# Altium PCB PCB.PcbDoc
Units mil, origin at the board's own origin, x right, y up, seen from the top; angles counter-clockwise.
Board outline 850 x 875 mil, 2 copper layers (Top Layer, Bottom Layer); 11 components, 16 nets, 48 pads, 8 vias.
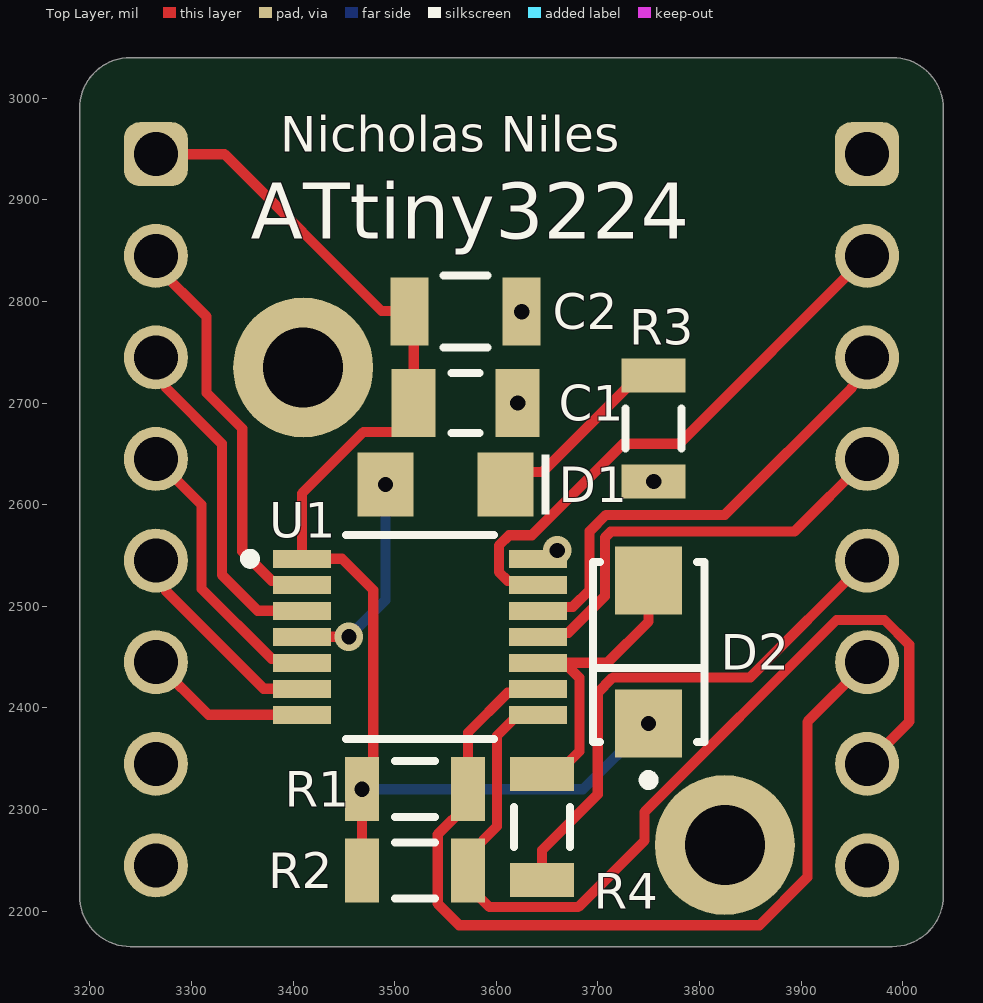
[diagram p0: Top Layer view]
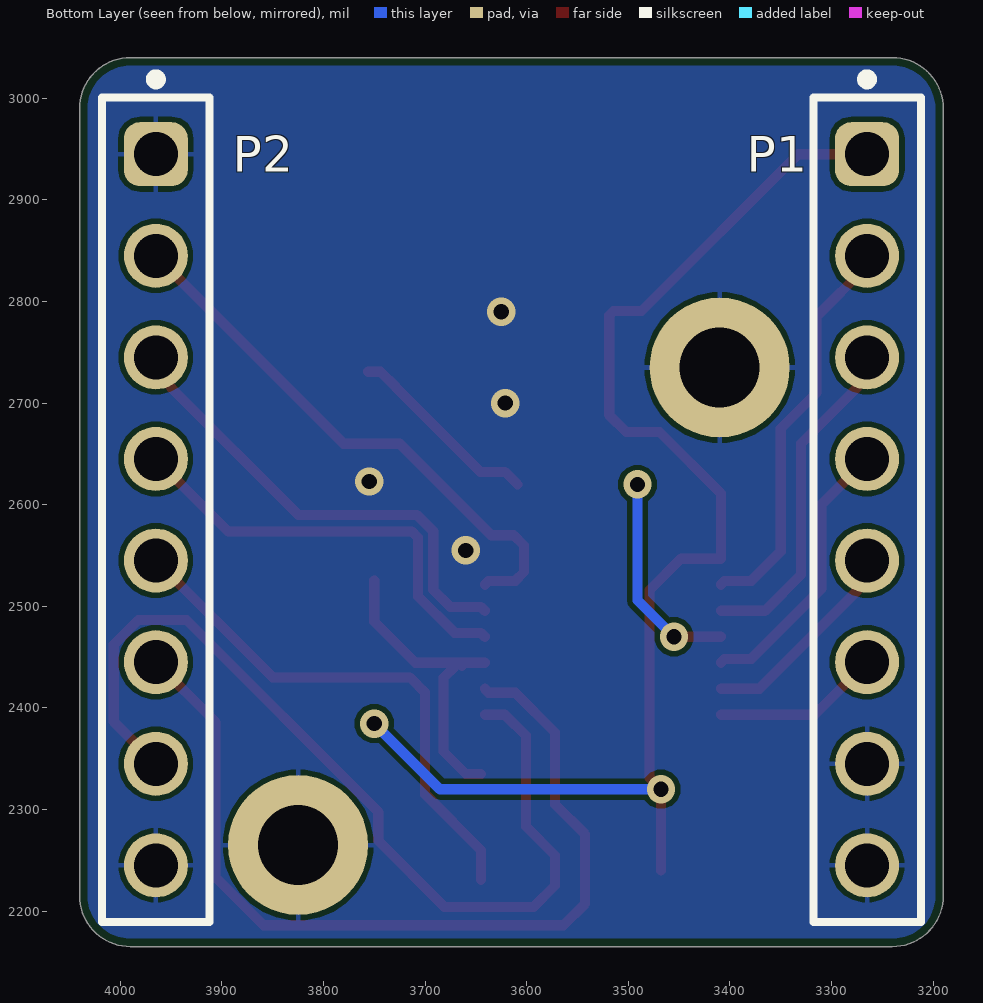
[diagram p1: Bottom Layer view, seen from below]
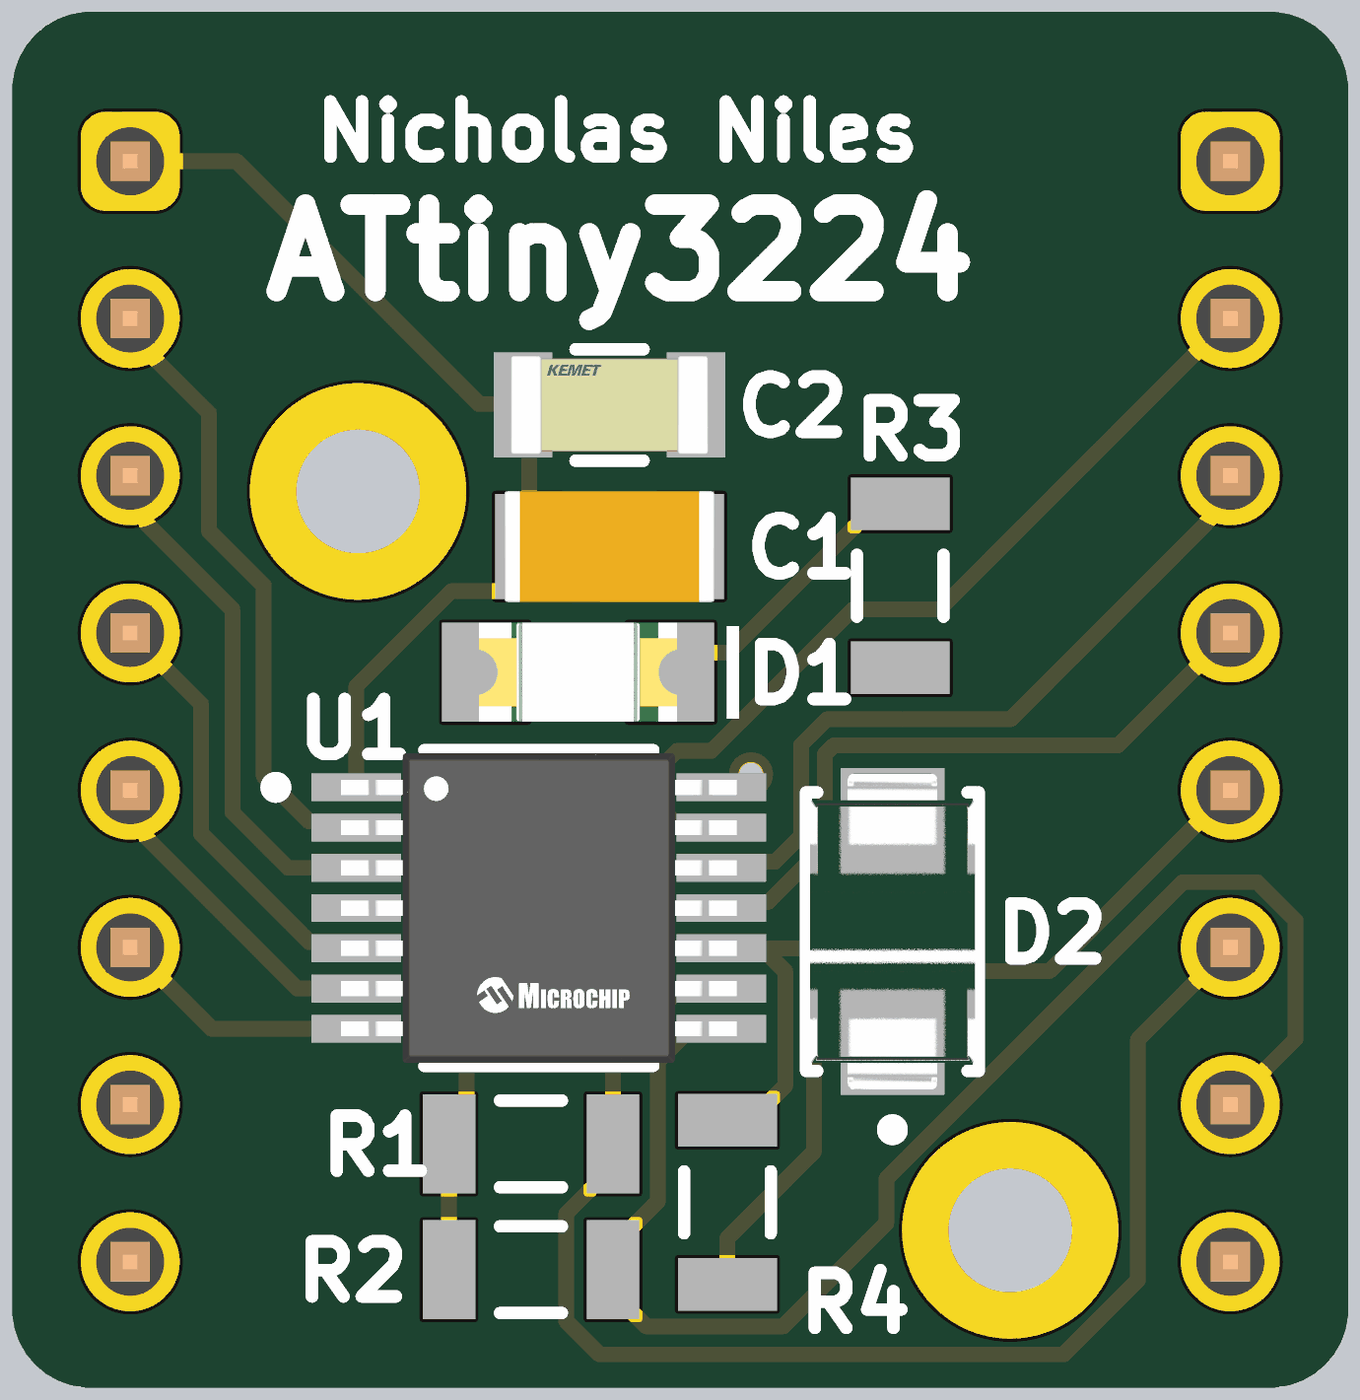
[diagram p2: 3D render of the assembled board from above, using the file's embedded part models]

## Layer stack, top to bottom
Top Solder: solder mask 0.4, Solder Resist, Dk 3.5
Top Layer: signal copper 1.4
Dielectric 1: dielectric 12.6, FR-4, Dk 4.8
Bottom Layer: signal copper 1.4
Bottom Solder: solder mask 0.4, Solder Resist, Dk 3.5

## Board outline
3190,2215 3190,2990 cw(c3240,2990) 3240,3040 3990,3040 cw(c3990,2990) 4040,2990 4040,2215 cw(c3990,2215) 3990,2165 3240,2165 cw(c3240,2215)

## Design rules (kind name [scope] priority, off if disabled: settings)
BoardOutlineClearance [All] p1: gap=7.87 ignorepadtopadclearanceinfootprint=FALSE
Clearance [All] p1: gap=5 ignorepadtopadclearanceinfootprint=TRUE except(10: Arc-Hole Track-Hole SMDPad-Hole THPad-Hole Via-Hole Fill-Hole Poly-Hole Region-Hole Text-Hole)
ComponentClearance [All] p1: gap=5 collisioncheckmode=3 verticalgap=5 showdistances=TRUE
DiffPairsRouting [All] p1: maxlimit=10 minlimit=5 mostfreqgap=5 toplayer_minwidth=5 toplayer_maxwidth=1000 toplayer_prefwidth=5 bottomlayer_minwidth=5 bottomlayer_maxwidth=1000 bottomlayer_prefwidth=5 maxuncoupledlength=500
Height [All] p1: minheight=0 maxheight=71497.94 prefheight=500
HoleSize [All] p1: absolutevalues=TRUE maxlimit=248.03 minlimit=11.81 maxpercent=80.000 minpercent=20.000
HoleToHoleClearance [All] p1: gap=10 allowstackedmicrovias=FALSE
MinimumAnnularRing [All] p1: minimumring=6
MinimumSolderMaskSliver [All] p1: minsoldermaskwidth=6
PlaneClearance [All] p1: clearance=5
PlaneConnect PlaneConnectPowerPads [InPadClass('PowerPads')] p1: planeconnectstyle=Direct reliefexpansion=20 reliefentries=4 reliefconductorwidth=10 reliefairgap=10
PlaneConnect [All] p2: pad.planeconnectstyle=Relief pad.reliefexpansion=11.81 pad.reliefentries=4 pad.reliefconductorwidth=5 pad.reliefairgap=5 via.planeconnectstyle=Direct via.reliefexpansion=11.81 via.reliefentries=4 via.reliefconductorwidth=5 via.reliefairgap=5
PolygonConnect PolygonConnectPowerPads [All vs (InPadClass('PowerPads'))] p1: connectstyle=Direct reliefconductorwidth=10 reliefentries=4 polygonreliefangle="90 Angle" airgapwidth=10
PolygonConnect [All] p2: thpad.connectstyle=Relief thpad.reliefconductorwidth=5 thpad.reliefentries=4 thpad.polygonreliefangle="90 Angle" thpad.airgapwidth=5 smdpad.connectstyle=Relief smdpad.reliefconductorwidth=5 smdpad.reliefentries=4 smdpad.polygonreliefangle="90 Angle" smdpad.airgapwidth=5 via.connectstyle=Direct via.reliefconductorwidth=5 via.reliefentries=4 via.polygonreliefangle="90 Angle" via.airgapwidth=5
RoutingVias [All] p1: holewidth=11.81 width=23.62 viastyle="Through Hole" minholewidth=11.81 minwidth=23.62 maxholewidth=23.62 maxwidth=259.84
SilkToSilkClearance [All] p1: silktosilkclearance=5
SilkToSolderMaskClearance [IsPad] p1: minsilkscreentomaskgap=5 clearancetoexposedcopper=TRUE
SolderMaskExpansion [All] p1: expansion=2 istentingtop=FALSE
SupplyNets "Schematic Supply Nets_1" [InNet('GND')] p1: voltage=0.000
SupplyNets "Schematic Supply Nets" [InNet('3V3')] p2: voltage=0.000
UnRoutedNet [All] p1: checkbadconnections=TRUE
Width Width_10mil [All] p1: maxlimit=1000 minlimit=10 preferedwidth=10 minimp=50.000000 maximp=50.000000 favimp=50.000000
Width Width_6mil [All] p2: maxlimit=1000 minlimit=6 preferedwidth=6 minimp=50.000000 maximp=50.000000 favimp=50.000000
Width Power_20mil [All] p3: maxlimit=1000 minlimit=20 preferedwidth=20 minimp=50.000000 maximp=50.000000 favimp=50.000000
Width Power_12mil [All] p4: maxlimit=1000 minlimit=12 preferedwidth=12 minimp=50.000000 maximp=50.000000 favimp=50.000000
Width Width_5mil [All] p5: maxlimit=1000 minlimit=5 preferedwidth=5 minimp=50.000000 maximp=50.000000 favimp=50.000000
19 further rules are at their usual default settings.

## Components (designator, comment, footprint, x,y, rotation, side; value= is the part's Value field where it differs from the comment)
C1 "0.1µF" CAPC3216X100X50LL20T25 3570,2700 r180 top
C2 "10nF" FP-C1206C-EB-MFG 3570,2790 r0 top value="10,000 pF"
D1 "150120RS75000" WL-SMCW_1206_150120xx75000 3550,2620 r180 top
D2 "SS14-E3/61T" FP-95400-MFG 3750,2455 r90 top
P1 "61300811121" 61300811121 3265,2595 r270 bottom locked
P2 "61300811121" 61300811121 3965,2595 r270 bottom locked
R1 "10kΩ" RESC3116X65X40LL10T20 3520,2320 r180 top
R2 "10kΩ" RESC3116X65X40LL10T20 3520,2240 r180 top
R3 "1kΩ" RESC3116X65X40LL10T20 3755,2675 r90 top
R4 "1kΩ" RESC3116X65X40LL10T20 3645,2282.83 r270 top
U1 "ATTINY3224-XU" FP-C04-087-ST-MFG 3525,2470 r0 top

## Footprints (in the part's own frame and the unit in brackets; to place one, negate y for a bottom-side part, rotate by r counter-clockwise, add the part's x,y. Pads: shape width x height; smd on the part's side, far side on the other; paste and mask are expansions set on the pad)
61300811121 [mm] "Pin Header, pitch 2.54 mm, THT, Vertical, single row, 8p"
  rrect50% 1.6x1.6 hole 1.1: 1(-8.89,0)
  round 1.6 hole 1.1: 2(-6.35,0) 3(-3.81,0) 4(-1.27,0) 5(1.27,0) 6(3.81,0) 7(6.35,0) 8(8.89,0)
  silkscreen extent -10.88,-1.35 10.31,1.35, body extent -10.16,-1.27 10.16,1.27, height 8.57
CAPC3216X100X50LL20T25 [mm] "Chip Capacitor, 2-Leads, Body 3.4x1.8mm, IPC High Density"
  rect 1.1x1.7 smd: 1(-1.3,0) 2(1.3,0)
  silkscreen extent -0.35,-0.75 0.35,0.75, body extent -1.7,-0.9 1.7,0.9, height 1
FP-95400-MFG [mm]
  rect 1.7x1.68 smd paste+0 mask+0: 1(-1.79,0) 2(1.79,0)
  silkscreen extent -3.32,-1.4 2.25,1.4, body extent -2.74,-1.5 2.74,1.5, height 0.25
FP-C04-087-ST-MFG [mm]
  rect 1.45x0.45 smd paste+0 mask+0: 1(-2.95,1.95) 2(-2.95,1.3) 3(-2.95,0.65) 4(-2.95,0) 5(-2.95,-0.65) 6(-2.95,-1.3) 7(-2.95,-1.95) 8(2.95,-1.95) 9(2.95,-1.3) 10(2.95,-0.65) 11(2.95,0) 12(2.95,0.65) 13(2.95,1.3) 14(2.95,1.95)
  silkscreen extent -4.37,-2.55 1.85,2.55, body extent -3.77,-2.65 3.77,2.65, height 0.25
FP-C1206C-EB-MFG [mm]
  rect 0.95x1.7 smd paste+0 mask+0: 1(-1.4,0) 2(1.4,0)
  silkscreen extent -0.55,-0.9 0.55,0.9, body extent -2,-1 2,1, height 0.25
RESC3116X65X40LL10T20 [mm] "Chip Resistor, 2-Leads, Body 3.10x1.60mm, IPC High Density"
  rect 0.85x1.6 smd: 1(-1.325,0) 2(1.325,0)
  silkscreen extent -0.5,-0.7 0.5,0.7, body extent -1.6,-0.85 1.6,0.85, height 0.65
WL-SMCW_1206_150120xx75000 [mm] "SMD Mono-color Chip LED, body 3.2x1.6mm"
  rect 1.4x1.6 smd: 1(-1.5,0) 2(1.5,0)
  silkscreen extent -2.6,-0.75 -2.4,0.75, body extent -1.6,-0.8 1.6,0.8, height 0.68

## Part data
C1: library part CMP-1664-00001-4, "Chip Capacitor, 100 nF, +/- 10%, 25 V, -55 to 125 degC, 1206 (3216 Metric), RoHS, Tape and Reel", Manufacturer=Kemet, Max Operating Temperature="125 degC", Min Operating Temperature="-55 degC", Package Quantity=4000, Voltage Rating="25 V", ComponentLink1Description="Manufacturer URL", ComponentLink1URL=http://www.kemet.com/, ComponentLink2Description=Datasheet, ComponentLink2URL=http://www.kemet.com/docfinder?Partnumber=C1206F104K3RACTU, DatasheetVersion=02/2016, Height="0.78 mm", Length="3.2 mm", Mounting Technology="Surface Mount", PackageDescription="2-Pin Surface Mount Device, Body 3.2 x 1.6 mm", PackageReference=1206, Packaging="Tape and Reel", REACH SVHC="No SVHC", RoHSCompliant=true
C2: library part CMP-03020-003656-1, "CAP CER 10000PF 100V X7R 1206", Capacitance="10,000 pF", Manufacturer=KEMET, Manufacturer Part Number=C1206C103J1RACTU, Package=C1206C-EB, Temperature="-55°C to +150°C", Temperature Characteristic=X7R, Temperature Coefficient=15%, Temperature Range High=+150°C, Temperature Range Low=-55°C, Tolerance=0.05, Voltage Rating="100 V", Automotive=Yes, Automotive Grade="Grade 0", Category=Cap, ComponentLink2Description=Datasheet, ComponentLink2URL=https://content.kemet.com/datasheets/KEM_C1007_X8R_ULTRA_150C_SMD.pdf, Device Class L1="Passive Components", Device Class L2=Capacitors, Device Class L3="Ceramic Capacitors", Digikey Description="CAP CER 10000PF 100V X7R 1206", Height=0.88mm, Ipc Land Pattern Name=CAPC320160X78, Lead Free=Yes, Material=Ceramic, Mouser Description="1206 C 10nF Ceramic Multilayer Capacitor, 100 VDC, +125degC, X7R Dielec, +/-5%", Octopart=https://octopart.com/c1206c103j1ractu-kemet-121270, RoHS=TRUE
D1: library part CMP-1426-00013-4, "WL-SMCW SMT Mono-Color Chip LED Waterclear", Case Code (Imperial)=1206, Case Code (Metric)=3216, Color=Red, Forward Current=100mA, Forward Voltage=2V, Max Junction Temperature (Tj)=95°C, Max Operating Temperature=85°C, Max Reverse Voltage (DC)=5V, Min Operating Temperature=-40°C, Power Dissipation=72mW, Test Current=20mA, Case/Package=1206, Dominant Wavelength=625nm, Height=680µm, Length=3.2mm, Lens Style="Clear, Rectangular", Luminous Intensity=150mcd, Mount="Surface Mount", Packaging="Tape and Reel", Peak Wavelength=630nm, REACH SVHC=Unknown, Reverse Voltage=5V, RoHS=Compliant, Viewing Angle=140°, Wavelength=625nm, Width=1.6mm
D2: library part CMP-02539-000035-1, "DIODE SCHOTTKY 40V 1A DO214AC", Forward Current=1A, Manufacturer=Vishay, Max Junction Temp=+150°C, Max Repetitive Reverse Voltage=40V, Max Surge Forward Current=40A, Package=95400, Peak Reverse Current=0.2mA, Temperature="-65°C to +150°C", Temperature Range Low=-65°C, Automotive=No, Category=Diode, ComponentLink2Description=Datasheet, ComponentLink2URL=http://www.vishay.com/docs/88746/ss12.pdf, Device Class L1="Discrete Semiconductors", Device Class L2=Diodes, Device Class L3="Schottky Diodes", Digikey Description="DIODE SCHOTTKY 40V 1A DO214AC", Footprint Url=http://www.vishay.com/docs/95400/sma.pdf, Height=2.29mm, Lead Free=Yes, Manufacturer Part Number=SS14-E3/61T, Mouser Description="SS14 Series 40 V 1 A Surface Mount Schottky Barrier Rectifier - DO-214AC (SMA)", Octopart=https://octopart.com/ss14-e3%2F61t-vishay-39552847, RoHS=TRUE, Standoff Height=0mm, Temperature Range High=+150°C
P1 P2: library part CMP-1502-01076-3, Color=Black, Contact Resistance=20mΩ, Current Rating=3A, Max Operating Temperature=105°C, Min Operating Temperature=-40°C, Operating Supply Voltage=250V, Connector Type="Male Pin", Contact Material=Copper, Contact Mating Length=5.9944mm, Contact Plating=Gold, Gender=Male, Height=8.54mm, Lead Pitch=2.54mm, Mount="Through Hole", NexarPartId=32855533, Number Of Contacts=8, Number of Pins=8, Number of Positions=8, Number of Rows=1, Orientation=Vertical, Packaging=Bulk, Pitch=2.54mm, REACH SVHC=Unknown, RoHS=Compliant, Termination=Solder, Voltage Rating=250V
R1 R2: library part CMP-1014-00623-2, "Chip Resistor, 10 KOhm, +/- 1%, 0.25 W, -55 to 155 degC, 1206 (3216 Metric), RoHS, Tape and Reel", Case Code (Imperial)=1206, Case Code (Metric)=3216, Manufacturer=Yageo, Max Operating Temperature=155degC, Min Operating Temperature=-55degC, Package Description="2-Pin Surface Mount Device, Body 3.1 x 1.6 mm", Package Quantity=5000, Package Reference=1206.0, Power Rating=250mW, Resistance=10KOhm, Temperature Coefficient=100ppm/degreesC, Tolerance=1%, Voltage Rating=200V, Case/Package=1206, Composition=ThickFilm, Datasheet URL=http://www.yageo.com/NewPortal/yageodocoutput?fileName=/pdf/R-Chip/PYu-RC_Group_51_RoHS_L_5.pdf, Datasheet Version="Rev. 5, 10/2016", Depth=1.6mm, Height=0.55mm, Lead Free=LeadFree, Length=3.1mm, Manufacturer URL=http://www.yageo.com/, Military Standard=Not, Packaging=TapeandReel, REACH SVHC=Unknown, RoHSCompliant=true, Termination=SMD/SMT, Width=1.6mm
R3 R4: library part CMP-2100-03678-1, "Chip Resistor, 1 KOhm, +/- 1%, 0.25 W, -55 to 155 degC, 1206 (3216 Metric), RoHS, Tape and Reel", Case Code (Imperial)=1206, Case Code (Metric)=3216, Manufacturer=Yageo, Max Operating Temperature=155degC, Min Operating Temperature=-55degC, Package Description="2-Pin Surface Mount Device, Body 3.1 x 1.6 mm", Package Reference=1206.0, Power Rating=250mW, Resistance=1KOhm, Temperature Coefficient=100ppm/degreesC, Tolerance=1%, Voltage Rating=200V, Case/Package=1206, Composition=ThickFilm, Datasheet URL=http://www.yageo.com/NewPortal/yageodocoutput?fileName=/pdf/R-Chip/PYu-RC_Group_51_RoHS_L_5.pdf, Datasheet Version="Rev. 5, 10/2016", Depth=1.6mm, Height=0.55mm, Lead Free=LeadFree, Length=3.1mm, Manufacturer URL=http://www.yageo.com/, Military Standard=Not, Packaging=TapeandReel, REACH SVHC=Unknown, RoHSCompliant=true, Termination=SMD/SMT
U1: library part CMP-00252-122240563-1, "ATTINY3224-XU Microcontroller 8-Bit AVR RISC 32KB Flash 1.8V to 5.5V 14-Pin TSSOP Tube", NexarPartId=122240563

## Free pads (board coordinates)
  round 137.79 hole 78.74: 7(3410,2735) 7(3825,2265)

## Via types
v1: diameter 28, hole 15, Top Layer to Bottom Layer, tented both sides, 8 vias

## Nets (pads, with @x,y where several pads share a name; then routed paths per layer and width w, separated by ;. In a path a pad name is that pad's centre, name@x,y a point inside that pad or via, vN(x,y) a via of type N, cw(c..) or ccw(c..) an arc to the next point about the centre after c; other vN are vias at no path point)
3V3: C1.2 C2.1 D2.1 P1.1 R1.2 R2.2 U1.1 | length 1296.2
  Top Layer w10: P1.1 3332.66,2945 3487.04,2790.62 3514.26,2790.62 3518.82,2786.06 C1.2 3518.82,2688.19 3502.17,2671.54 3469.28,2671.54 3408.86,2611.11 U1.1 3448.23,2546.77 3479,2516 3479,2331.17 v1(3467.83,2320) R2.2
  Bottom Layer w10: v1(3467.83,2320) 3685.47,2320 v1(3750,2384.53)
GND: C1.1 C2.2 P1.7 P1.8 P2.1 P2.8 pad.7 R3.1 U1.14
  other v1: 3660,2555 3755,2622.83 3621.18,2700 3625.12,2790
NetD1_1: D1.1 R3.2 | length 193
  Top Layer w10: D1.1 3621.38,2632.33 3645.76,2632.33 3728.5,2715.07 3728.5,2715.43 3743.96,2730.89 R3.2@3755.89,2730.89
PA0: D2.2 R4.1 U1.10 | length 303.1
  Top Layer w10: U1.10 U1.10@3663.81,2444.41 ; R4.1 3659.76,2335 3681.82,2357.06 3681.82,2429.68 3670.95,2440.55 ; U1.10@3663.81,2441.43 U1.10@3663.81,2444.41 ; D2.2 3750,2485 3709.41,2444.41 3670.95,2444.41 U1.10@3663.81,2444.41
PA1: P2.4 U1.11 | length 430.2
  Top Layer w10: U1.11 3645,2473.86 3670.95,2473.86 3706.93,2509.83 3706.93,2567.61 3712.79,2573.46 3893.46,2573.46 P2.4
PA2: P2.3 U1.12 | length 469.8
  Top Layer w10: U1.12 3645,2499.45 3675.33,2499.45 3691.93,2516.05 3691.93,2573.82 3708.11,2590 3825,2590 3949.62,2714.62 3949.62,2715.28 3965,2730.66 P2.3
PA3: P2.2 U1.13 | length 550.3
  Top Layer w10: U1.13 3637.28,2525.04 3611.33,2525.04 3602.6,2533.77 3602.6,2559.77 3612.83,2570 3635,2570 3725,2660 3780,2660 P2.2
PA4: P1.2 U1.2 | length 398.6
  Top Layer w10: P1.2 3265,2835 3315,2785 3315,2710 3350,2675 3350,2554.09 3379.05,2525.04 3405,2525.04 U1.2
PA5: P1.3 U1.3 | length 334.5
  Top Layer w10: P1.3 3275.14,2734.86 3275.14,2714.86 3330,2660 3330,2530.91 3365.32,2495.59 U1.3
PA6: D1.2 U1.4 | length 211
  Top Layer w10: U1.4 v1(3455,2470)
  Bottom Layer w10: v1(3455,2470) 3490.94,2505.94 v1(3490.94,2620)
PA7: P1.4 U1.5 | length 275.4
  Top Layer w10: P1.4 3310,2600 3310,2517.31 3379.05,2448.27 3405,2448.27 U1.5
PB0: P2.6 R1.1 U1.9 | length 895.7
  Top Layer w10: U1.9 3637.28,2414.96 3611.33,2414.96 3572.17,2375.8 R1.1 3572.17,2305.24 3542.48,2275.55 3542.48,2207.32 3563.69,2186.1 3859.09,2186.1 3906.27,2233.28 3906.27,2386.27 P2.6
PB1: P2.7 R2.1 U1.8 | length 929.3
  Top Layer w10: U1.8 3621.46,2393.23 3600.75,2372.52 3600.75,2283.35 3572.17,2254.76 3572.17,2225.24 3593.46,2203.94 3680.64,2203.94 3746.1,2269.4 3746.1,2297.68 3934.92,2486.5 3982.19,2486.5 4006.5,2462.19 4006.5,2386.5 P2.7
PB2: P1.5 U1.6 | length 207.8
  Top Layer w10: P1.5 3275.14,2534.86 3275.14,2514.86 3371.17,2418.83 U1.6
PB3: P1.6 U1.7 | length 165.3
  Top Layer w10: P1.6 3316.77,2393.23 U1.7
UPDI: P2.5 R4.2 | length 526.1
  Top Layer w10: R4.2 3645,2260 3700,2315 3700,2415 3706.93,2421.93 3706.93,2422.13 3714.79,2430 3850,2430 P2.5

## Polygon pours and split planes (outlines as drawn)
GND on Bottom Layer "NONET_L02_P-001" (solid, pour order 0): 3190,3040 4040,3040 4040,2165 3190,2165

## Silkscreen, mask and mechanical layers (free items; w line width, h text height)
Top Overlay:
  text "Nicholas Niles" at 3387.57,2947.51 h35
  text "ATtiny3224" at 3358.42,2861.67 h55
Mechanical 1:
  the board outline again, w10